# Altium PCB 电子脚铐便携式主控板V3-改版V1.PcbDoc (part 1 of 3)
Units mm, origin at the board's own origin, x right, y up, seen from the top; angles counter-clockwise.
Board outline 54 x 105 mm, 2 copper layers (Top Layer, Bottom Layer), stack 1.271 mm thick; 103 components, 64 nets, 340 pads, 43 vias.
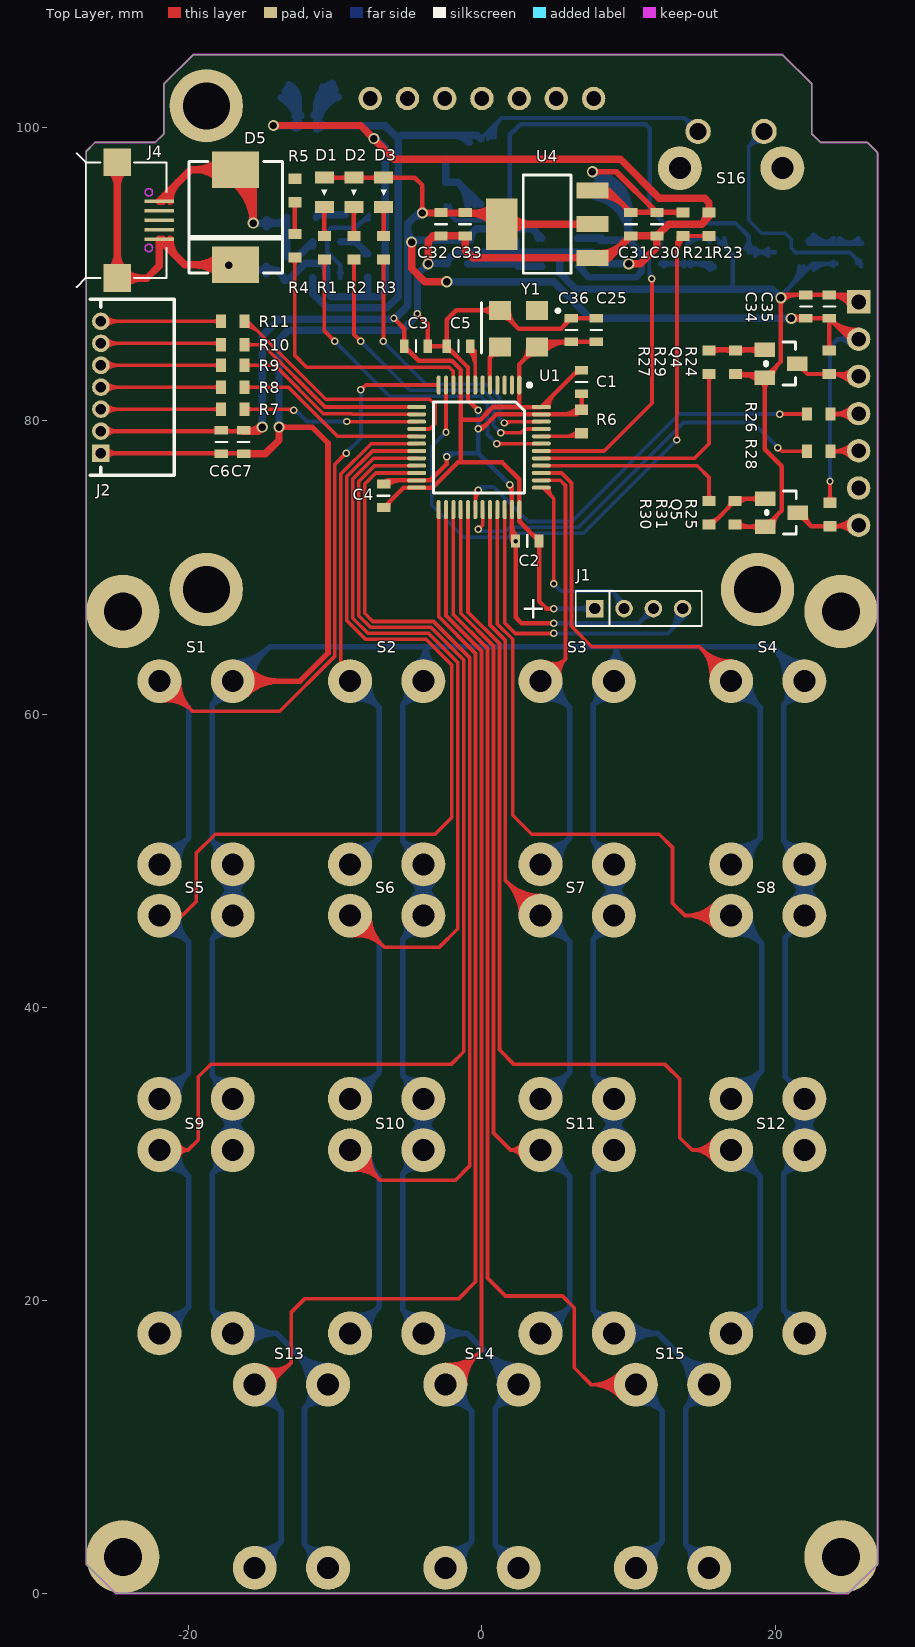
[diagram p0: Top Layer view]
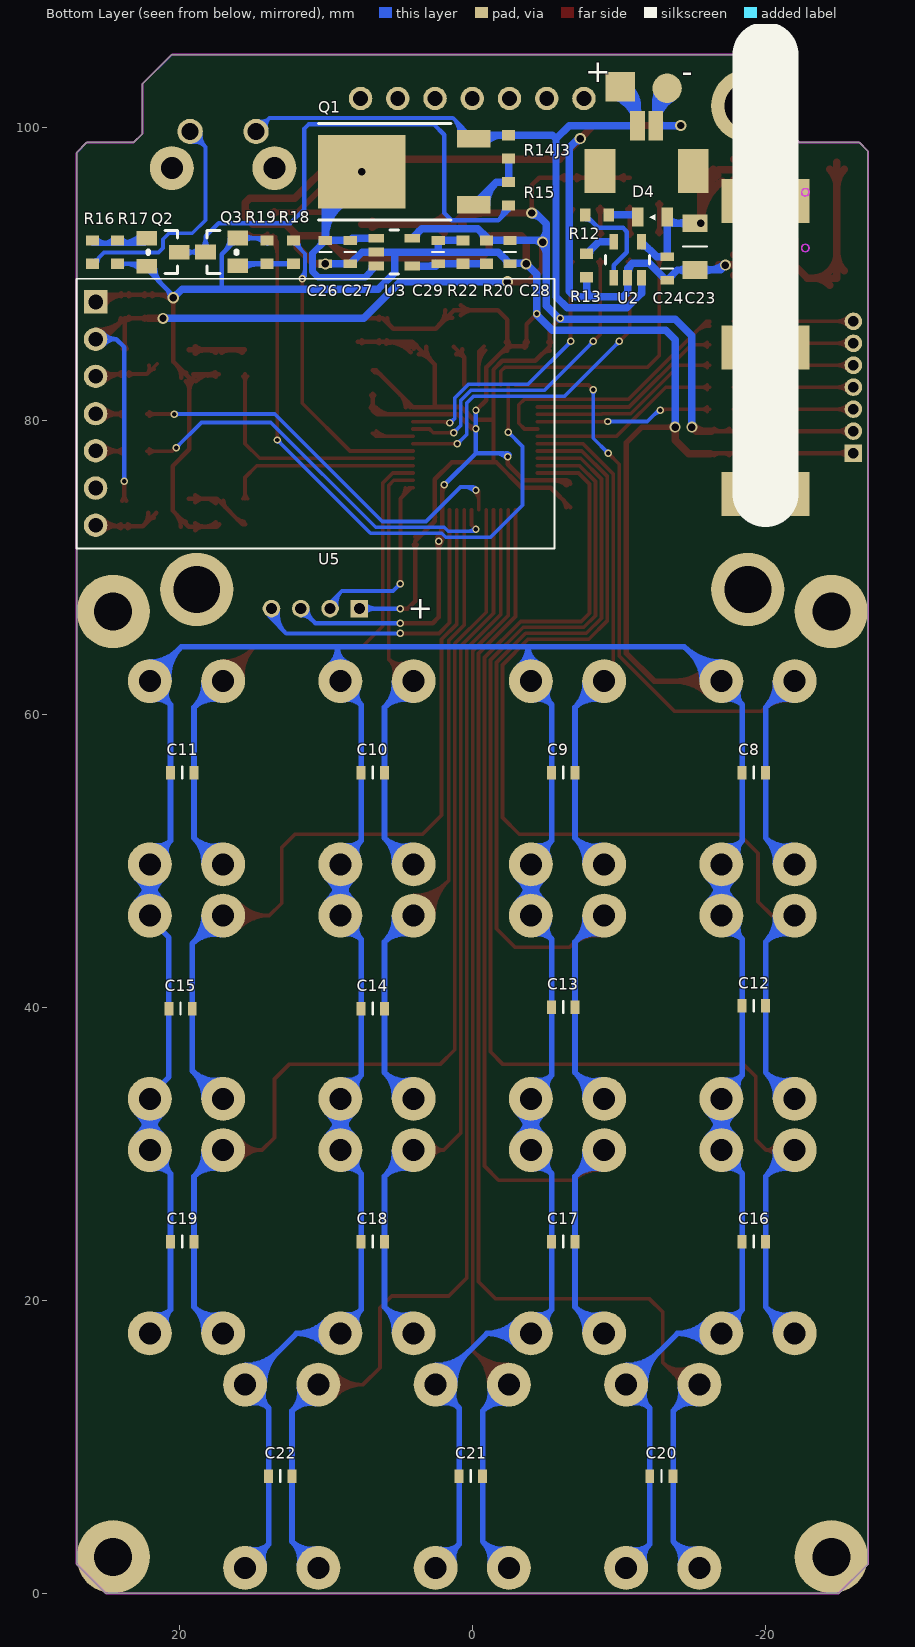
[diagram p1: Bottom Layer view, seen from below]
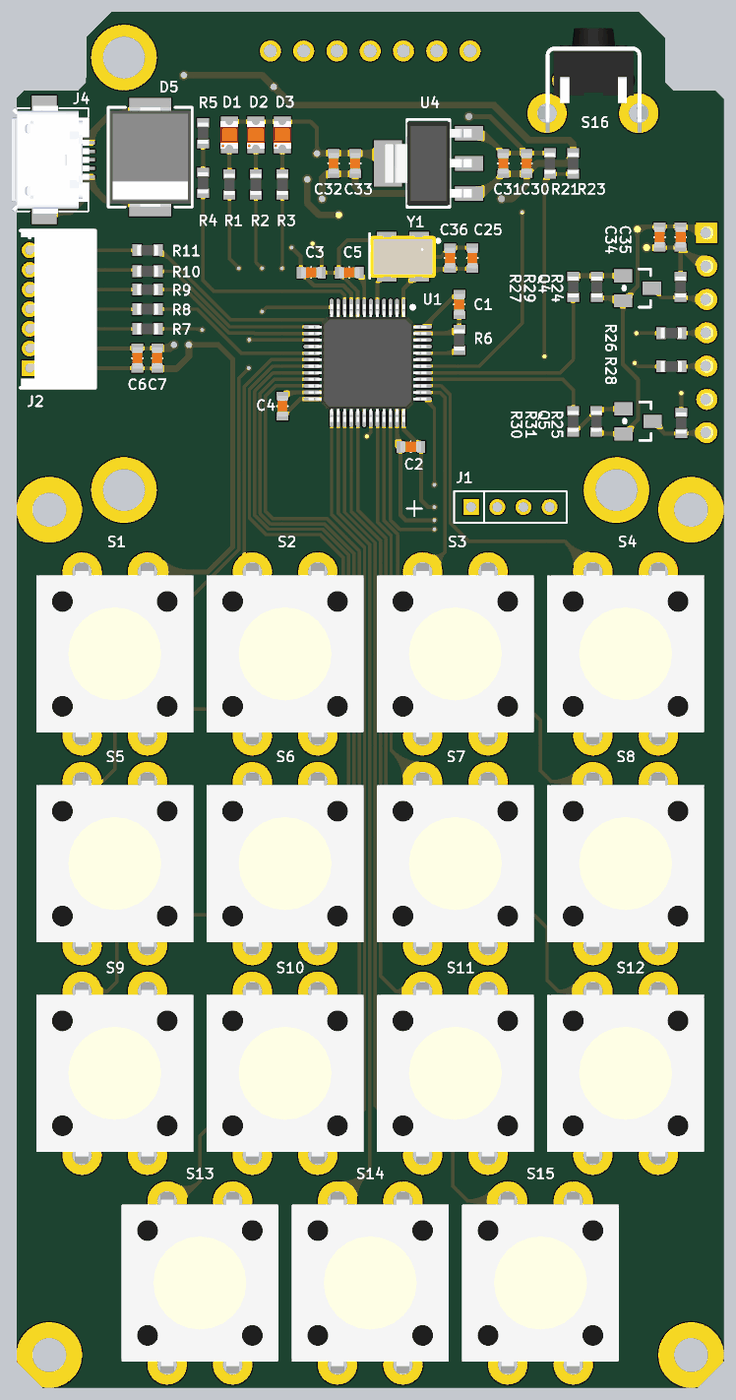
[diagram p4: 3D render of the assembled board from above, using the file's embedded part models]
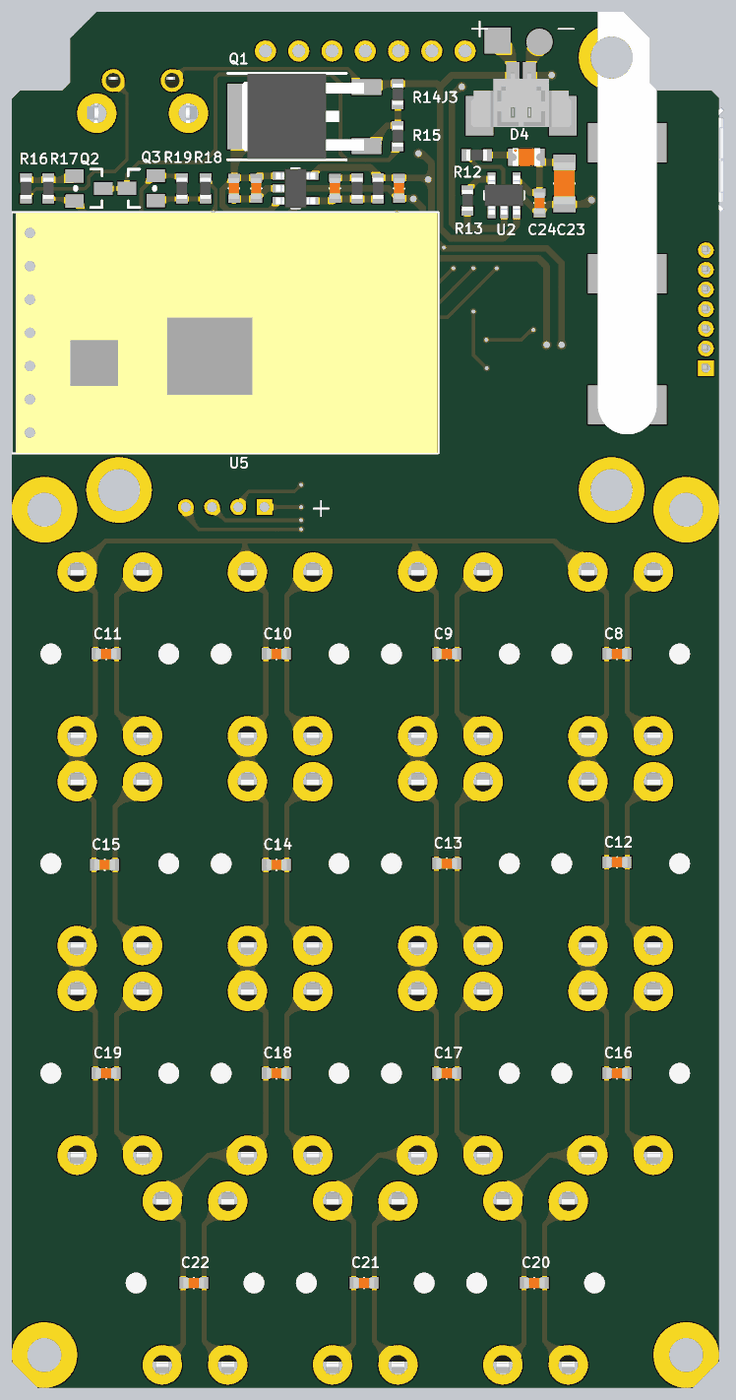
[diagram p5: 3D render of the assembled board from below, using the file's embedded part models]

## Layer stack, top to bottom
Top Solder: solder mask 0.0102, Solder Resist, Dk 3.5
Top Layer: signal copper 0.0356
Dielectric 1: dielectric 1.2, FR-4, Dk 4.8
Bottom Layer: signal copper 0.0356
Bottom Solder: solder mask 0.0102, Solder Resist, Dk 3.5

## Board outline
-27,2 -25,0 25,0 27,2 27,98.3 26.3,99 23.1,99 22.5,99.6 22.5,103 20.5,105 -19.7,105 -21.7,103 -21.7,99.6 -22.3,99 -26.4,99 -27,98.4

## Design rules (kind name [scope] priority, off if disabled: settings)
Clearance [All] p1: gap=0.152
ComponentClearance [All] p1: gap=0 collisioncheckmode=3 verticalgap=0 showdistances=FALSE
Height [All] p1: minheight=0 maxheight=50.8 prefheight=12.7
HoleSize [All] p1: absolutevalues=TRUE maxlimit=5.08 minlimit=0.025 maxpercent=80.000 minpercent=20.000
HoleToHoleClearance [All] p1: gap=0.152 allowstackedmicrovias=TRUE
MinimumSolderMaskSliver [All] p1: minsoldermaskwidth=0
PlaneConnect [All] p1: planeconnectstyle=Direct reliefexpansion=0.508 reliefentries=4 reliefconductorwidth=0.254 reliefairgap=0.254
PolygonConnect [All] p1: connectstyle=Direct reliefconductorwidth=0.254 reliefentries=4 polygonreliefangle="90 Angle" airgapwidth=0.254
RoutingVias [All] p1: holewidth=0.711 width=1.27 viastyle="Through Hole" minholewidth=0.203 minwidth=0.305 maxholewidth=5.08 maxwidth=7.62
SilkToSilkClearance [All] p1: silktosilkclearance=0
SilkToSolderMaskClearance [IsPad] p1: minsilkscreentomaskgap=0 clearancetoexposedcopper=TRUE
SolderMaskExpansion [All] p1: expansion=0.102
Width [All] p1: maxlimit=4 minlimit=0.254 preferedwidth=0.254
21 further rules are at their usual default settings.

## Classes and differential pairs
component class 电子脚铐便携式主控板-Frame: C6 C7 J2 R7 R8 R9 R10 R11
component class Designator: C23 C24 C26 C27 C28 C29 C30 C31 C32 C33 D4 D5 J3 J4 Q1 Q2 Q3 R12 R13 R14 R15 R16 R17 R19 R20 R21 R22 R23 S16 U2 U3 U4

## Components (designator, comment, footprint, x,y, rotation, side; value= is the part's Value field where it differs from the comment)
C1 "0.1uF" C0603 6.8,82.662 r270 top
C2 "0.1uF" C0603 3.1,71.8 r180 top
C3 "0.1uF" C0603 -4.5,85.1 r0 top
C4 "0.1uF" C0603 -6.7,74.9 r90 top
C5 "0.1uF" C0603 -1.6,85.1 r180 top
C6 "10uF" C0603 -17.78,78.566 r270 top
C7 "0.1uF" C0603 -16.256,78.566 r270 top
C8 "0.1uF" C0603 -19.212,56 r0 bottom
C9 "0.1uF" C0603 -6.212,56 r0 bottom
C10 "0.1uF" C0603 6.788,56 r0 bottom
C11 "0.1uF" C0603 19.788,56 r0 bottom
C12 "0.1uF" C0603 -19.212,40.1 r0 bottom
C13 "0.1uF" C0603 -6.212,40 r0 bottom
C14 "0.1uF" C0603 6.788,39.9 r0 bottom
C15 "0.1uF" C0603 19.9,39.9 r0 bottom
C16 "0.1uF" C0603 -19.212,24 r0 bottom
C17 "0.1uF" C0603 -6.212,24 r0 bottom
C18 "0.1uF" C0603 6.788,24 r0 bottom
C19 "0.1uF" C0603 19.788,24 r0 bottom
C20 "0.1uF" C0603 -12.904,8 r0 bottom
C21 "0.1uF" C0603 0.096,8 r0 bottom
C22 "0.1uF" C0603 13.096,8 r0 bottom
C23 "10uF" C1206 -15.2,91.9 r270 bottom
C24 "0.1uF" C0603 -13.3,90.4 r270 bottom
C25 "10uF" C0603 7.8,86.2 r270 top
C26 "10uF" C0603 10.024,91.519 r270 bottom
C27 "0.1uF" C0603 8.324,91.519 r90 bottom
C28 "10uF" C0603 -2.576,91.519 r270 bottom
C29 "470pF" C0603 2.324,91.519 r90 bottom
C30 "10uF" C0603 11.938,93.425 r270 top
C31 "0.1uF" C0603 10.16,93.425 r270 top
C32 "10uF" C0603 -2.794,93.425 r270 top
C33 "0.1uF" C0603 -1.143,93.425 r270 top
C34 "10uF" C0603 22.1,87.8 r90 top
C35 "0.1uF" C0603 23.7,87.8 r90 top
C36 "0.1uF" C0603 6.1,86.2 r270 top
D1 "LED" LED0805 -10.749,95.603 r270 top
D2 "LED" LED0805 -8.729,95.603 r270 top
D3 "LED" LED0805 -6.708,95.603 r270 top
D4 "LED-G" LED0805 -12.3,93.9 r0 bottom
D5 "1.5SMC6.8A" SMC -16.8,93.9 r270 top
J1 "SHD1X4-2.00" Jk1*4-2.0 10.7,67.2 r0 top
J2 "Jack 1x7" ZH-7AWD -26,82.3 r90 top
J3 "Jack 1x2" DF13-2P-1.25V -11.9,98.6 r180 bottom locked
J4 "MicroUSB" MICRO-USB -23.2,93.7 r90 top
Q1 "2SA1615" TO-252 3.724,97 r90 bottom
Q2 "S8050" SOT-23 21.1,91.507 r270 bottom
Q3 "S8050" SOT-23 17.1,91.531 r90 bottom
Q4 "S8050" SOT-23 20.4,83.9 r270 top
Q5 "S8050" SOT-23 20.447,73.74 r270 top
R1 "1K" R0603 -10.749,91.82 r270 top
R2 "1K" R0603 -8.729,91.82 r270 top
R3 "1K" R0603 -6.708,91.82 r270 top
R4 "NC" R0603 -12.762,91.947 r270 top
R5 "NC" R0603 -12.762,95.73 r270 top
R6 "100K" R0603 6.8,79.962 r90 top
R7 "0R" R0603 -17,80.8 r180 top
R8 "0R" R0603 -17,82.3 r180 top
R9 "0R" R0603 -17,83.8 r180 top
R10 "0R" R0603 -17,85.2 r180 top
R11 "0R" R0603 -17,86.8 r180 top
R12 "1K" R0603 -8.509,94.06 r180 bottom
R13 "1.65K" R0603 -7.8,90.6 r90 bottom
R14 "200K" R0603 -2.476,98.7 r270 bottom
R15 "0R" R0603 -2.476,95.5 r270 bottom
R16 "20K" R0603 25.9,91.519 r90 bottom
R17 "10K" R0603 24.2,91.519 r270 bottom
R18 "20K" R0603 12.2,91.519 r270 bottom
R19 "10K" R0603 14,91.519 r90 bottom
R20 "100K" R0603 -0.976,91.519 r270 bottom
R21 "200K" R0603 13.716,93.425 r270 top
R22 "160K" R0603 0.624,91.519 r90 bottom
R23 "100K" R0603 15.494,93.425 r90 top
R24 "200K" R0603 23.7,84 r90 top
R25 "200K" R0603 23.749,73.613 r90 top
R26 "200K" R0603 22.987,80.471 r180 top
R27 "200K" R0603 15.5,84 r270 top
R28 "200K" R0603 22.987,77.931 r180 top
R29 "10K" R0603 17.3,84 r90 top
R30 "200K" R0603 15.494,73.74 r90 top
R31 "10K" R0603 17.272,73.74 r90 top
S1 "Switch" B3F-4055 -19.5,56 r90 top
S2 "Switch" B3F-4055 -6.5,56 r90 top
S3 "Switch" B3F-4055 6.5,56 r90 top
S4 "Switch" B3F-4055 19.5,56 r90 top
S5 "Switch" B3F-4055 -19.5,40 r90 top
S6 "Switch" B3F-4055 -6.5,40 r90 top
S7 "Switch" B3F-4055 6.5,40 r90 top
S8 "Switch" B3F-4055 19.5,40 r90 top
S9 "Switch" B3F-4055 -19.5,24 r90 top
S10 "Switch" B3F-4055 -6.5,24 r90 top
S11 "Switch" B3F-4055 6.5,24 r90 top
S12 "Switch" B3F-4055 19.5,24 r90 top
S13 "Switch" B3F-4055 -13,8 r90 top
S14 "Switch" B3F-4055 0,8 r90 top
S15 "Switch" B3F-4055 13,8 r90 top
S16 "Switch" SWITCH-H 17,98.5 r180 top
U1 "STM32F103CB" LQFP48 -0.2,78.2 r270 top
U2 "SE9016" SOT-23-5 -10.6,91 r90 bottom
U3 "MIC5219YM5" SOT-23-5 5.324,91.519 r180 bottom
U4 "LM1117IMPX-3.3" SOT-223 4.445,93.425 r90 top
U5 "APC340" APC340 25.7,80.5 r180 bottom locked
Y1 "8MHz" XTAL5032 2.5,86.3 r180 top

## Footprints (in the part's own frame and the unit in brackets; to place one, negate y for a bottom-side part, rotate by r counter-clockwise, add the part's x,y. Pads: shape width x height; smd on the part's side, far side on the other; paste and mask are expansions set on the pad)
APC340 [mm]
  rect 1.6x1.6 hole 1: 1(0,7.62)
  round 1.6 hole 1: 2(0,5.08) 3(0,2.54) 4(0,0) 5(0,-2.54) 6(0,-5.08) 7(0,-7.62)
  silkscreen extent -1.3,-9.2 31.3,9.2, body extent -1,-9.15 31.2,9.15, height 2
B3F-4055 [mm]
  round 3 hole 1.5: 1(-6.25,-2.5) 1(6.25,-2.5) 2(-6.25,2.5) 2(6.25,2.5)
  body extent -6.9,-6 6.9,6, height 7.3
C0603 [mm]
  rect 0.6x0.9 smd: 1(-0.8,0) 2(0.8,0)
  silkscreen extent 0,-0.4 0,0.4, body extent -0.8,-0.4 0.8,0.4, height 0.5
C1206 [mm]
  rect 1.2x1.7 smd: 1(-1.6,0) 2(1.6,0)
  silkscreen extent 0,-0.8 0,0.8, body extent -1.6,-0.8 1.6,0.8, height 1.25
DF13-2P-1.25V [mm]
  rect 1x2 smd: 1(-0.625,1.55) 2(0.625,1.55)
  rect 2.1x3 smd: 3(-3.175,-1.55) 4(3.175,-1.55)
  body extent -3.83,-2.41 3.82,1.79, height 4.8
Jk1*4-2.0 [mm] "4P，直插，2.0mm间距，排母"
  rect 1.2x1.2 hole 0.762: 1(-3,0)
  round 1.2 hole 0.762: 2(-1,0) 3(1,0) 4(3,0)
  silkscreen extent -4.3,-1.2 4.3,1.2, body extent -4.25,-1.22 4.25,1.18, height 4.3
LED0805 [mm]
  rect 0.8x1.3 smd: 1(-1,0) 2(1,0)
  silkscreen extent -0.18,-0.2 0.22,0.2, body extent -1.05,-0.68 1.05,0.67, height 0.8
LQFP48 [mm]
  oval 1.3x0.28 smd: 1(-4.25,2.75) 2(-4.25,2.25) 3(-4.25,1.75) 4(-4.25,1.25) 5(-4.25,0.75) 6(-4.25,0.25) 7(-4.25,-0.25) 8(-4.25,-0.75) 9(-4.25,-1.25) 10(-4.25,-1.75) 11(-4.25,-2.25) 12(-4.25,-2.75) 25(4.25,-2.75) 26(4.25,-2.25) 27(4.25,-1.75) 28(4.25,-1.25) 29(4.25,-0.75) 30(4.25,-0.25) 31(4.25,0.25) 32(4.25,0.75) 33(4.25,1.25) 34(4.25,1.75) 35(4.25,2.25) 36(4.25,2.75)
  oval 0.28x1.3 smd: 13(-2.75,-4.25) 14(-2.25,-4.25) 15(-1.75,-4.25) 16(-1.25,-4.25) 17(-0.75,-4.25) 18(-0.25,-4.25) 19(0.25,-4.25) 20(0.75,-4.25) 21(1.25,-4.25) 22(1.75,-4.25) 23(2.25,-4.25) 24(2.75,-4.25) 37(2.75,4.25) 38(2.25,4.25) 39(1.75,4.25) 40(1.25,4.25) 41(0.75,4.25) 42(0.25,4.25) 43(-0.25,4.25) 44(-0.75,4.25) 45(-1.25,4.25) 46(-1.75,4.25) 47(-2.25,4.25) 48(-2.75,4.25)
  silkscreen extent -4.37,-3.1 3.1,3.58, body extent -4.49,-4.5 4.51,4.5, height 1.8
MICRO-USB [mm]
  rect 0.25x2 smd: 1(1.3,-1.179) 2(0.65,-1.179) 3(0,-1.179) 4(-0.65,-1.179) 5(-1.3,-1.179)
  rect 1.9x1.9 smd: 5(-3.95,1.679) 5(3.95,1.679)
  Keep-Out Layer circle w0.102: c1.9,-0.471 r0.254
  Keep-Out Layer circle w0.102: c-1.9,-0.471 r0.254
  silkscreen extent -4.57,-1.68 4.57,4.46, body extent -4.1,-1.75 4.1,4.18, height 2.77
R0603 [mm]
  rect 0.7x0.9 smd: 1(-0.8,0) 2(0.8,0)
  body extent -0.8,-0.4 0.8,0.4, height 0.37
SMC [mm]
  rect 2.5x3.2 smd: 1(-3.25,0) 2(3.25,0)
  silkscreen extent -3.8,-3.2 3.8,3.2, body extent -3.8,-3.1 3.8,3.12, height 2.8
SOT-23 [mm]
  rect 1x1.4 smd: 1(-0.95,-1.1) 2(0.95,-1.1) 3(0,1.1)
  silkscreen extent -1.47,-1.02 1.45,1, body extent -1.41,-1 1.38,1.42, height 1.09
SOT-23-5 [mm]
  rect 1.05x0.6 smd: 1(-1.225,0.95) 2(-1.225,0) 3(-1.225,-0.95) 4(1.225,-0.95) 5(1.225,0.95)
  silkscreen extent -0.3,-1.5 0.3,1.5, body extent -1.5,-1.5 1.5,1.5, height 1.2
SOT-223 [mm]
  rect 1.1x2.15 smd: 1(-2.3,-3.1) 2(0,-3.1) 3(2.3,-3.1)
  rect 3.5x2.15 smd: 4(0,3.1)
  silkscreen extent -3.35,-1.63 3.35,1.63, body extent -3.15,-3.3 3.15,3.3, height 1.8
SWITCH-H [mm]
  round 3 hole 1.5: 0(-3.5,1.25) 0(3.5,1.25)
  round 1.727 hole 1.143: 1(-2.25,-1.25) 2(2.25,-1.25)
  body extent -4.23,-5.26 4.13,2.71, height 7.37
TO-252 [mm]
  rect 1.2x2.28 smd: 1(-2.25,-3.816) 3(2.25,-3.816)
  rect 5x6 smd: 2(0,3.816)
  silkscreen extent -3.3,-2.27 3.3,6.78, body extent -3.25,-3.62 3.25,5.68, height 2.3
XTAL5032 [mm]
  rect 1.5x1.3 smd: 1(-1.25,-1.25) 2(1.25,-1.25) 3(1.25,1.25) 4(-1.25,1.25)
  silkscreen extent -2.81,-1.78 2.54,1.65, body extent -2.5,-1.6 2.5,1.6, height 1.2
ZH-7AWD [mm] "1.5mm，7P，卧插"
  rect 1.2x1.2 hole 0.7: 1(-4.5,0)
  round 1.2 hole 0.7: 2(-3,0) 3(-1.5,0) 4(0,0) 5(1.5,0) 6(3,0) 7(4.5,0)
  silkscreen extent -6,-5 6,0.7, body extent -5.9,-5.05 6.1,0.65, height 3.95

## Part data
C1 C2 C3 C4 C5 C8 C9 C10 C11 C12 C13 C14 C15 C16 C17 C18 C19 C20 C21 C22 C25 C27 C36: library part "Cap Semi"
C6 C7 C26 C28 C29 C30 C31 C32 C33 C34 C35: library part CAP, "CAP"
C23 C24: library part Cap, "Capacitor"
D4: library part LED
D5: library part Diode-TVS
J1: library part HEADER1X4
J2 J3: "插座"
Q1: library part MJD122
Q2 Q3 Q4 Q5: "NPN triode, 0.5A Max"
R1 R2 R3 R4 R5 R12 R13: library part Res, "Resistor"
R6 R7 R8 R9 R10 R11 R14 R16 R17 R18 R19 R20 R21 R22 R23: library part Res
R15 R24 R25 R26 R27 R28 R29 R30 R31: library part RES, "Resistor"
S1 S2 S3 S4 S5 S6 S7 S8 S9 S10 S11 S12 S13 S14 S15 S16: library part Sw
U1: library part STM32F103Cx
U3: library part MIC5205
U4: library part AMS1117, "800mA Low-Dropout Linear Regulator"
Y1: library part XTAL, "SM crystal oscilator"

## Free pads (board coordinates)
  round 5 hole 2.6: ""(-24.5,2.5) ""(-24.5,67) ""(24.5,2.5) ""(24.5,67)
  rect 2x3 smd far side: ""(-22,75) ""(-22,85) ""(-22,95) ""(-18,75) ""(-18,85) ""(-18,95)
  round 5 hole 3.2: ""(-18.8,68.5) ""(-18.8,101.5) ""(18.8,68.5)
  round 2 smd far side: ""(-13.3,102.7)
  rect 2x2 smd far side: ""(-10.1,102.8)
  round 1.6 hole 1: ""(-7.62,102) ""(-5.08,102) ""(-2.54,102) ""(0,102) ""(2.54,102) ""(5.08,102) ""(7.62,102)

## Via types
v1: diameter 0.508, hole 0.305, Top Layer to Bottom Layer, tented both sides, 29 vias
v2: diameter 0.762, hole 0.508, Top Layer to Bottom Layer, tented both sides, 14 vias

## Nets (pads, with @x,y where several pads share a name; then routed paths per layer and width w, separated by ;. In a path a pad name is that pad's centre, name@x,y a point inside that pad or via, vN(x,y) a via of type N, cw(c..) or ccw(c..) an arc to the next point about the centre after c; other vN are vias at no path point)
+3.3V: C1.1 C2.1 C3.1 C4.1 C6.1 C7.1 C25.2 C28.1 C32.1 C33.1 C34.1 C35.1 C36.2 D1.1 D2.1 D3.1 J1.1 J2.2 R20.1 R24.2 R25.2 U1.1 U1.9 U1.24 U1.36 U1.48 U3.5 U4.2 U4.4 U5.2 Y1.4 | length 221
  Top Layer w0.305: J2.2@-26,79.3 C7.1@-16.3,79.3 ; J2.2@-25.683,78.984 cw(c-24.919,78.219) -24.919,79.3 cw(c-24.919,80.381) J2.2@-25.683,79.617 ; -18.446,79.3 ccw(c-18.446,79.882) C6.1@-18.034,79.47 ; C6.1@-17.526,79.47 ccw(c-17.114,79.882) -17.114,79.3 ; -16.922,79.3 ccw(c-16.922,79.882) C7.1@-16.51,79.47 ; D1.1@-10.749,96.603 D2.1@-8.729,96.603 D3.1@-6.708,96.603 -4.575,96.603 -4.064,96.092 v2(-4.064,94.187) ; D1.1@-10.324,96.428 cw(c-9.901,96.005) -9.901,96.603 cw(c-9.901,97.201) D1.1@-10.324,96.778 ; D2.1@-9.154,96.428 ccw(c-9.576,96.005) -9.576,96.603 ccw(c-9.576,97.201) D2.1@-9.154,96.778 ; D2.1@-8.304,96.428 cw(c-7.881,96.005) -7.881,96.603 cw(c-7.881,97.201) D2.1@-8.304,96.778 ; D3.1@-7.133,96.428 ccw(c-7.556,96.005) -7.556,96.603 ccw(c-7.556,97.201) D3.1@-7.133,96.778 ; C4.1@-6.7,74.1 -5.35,75.45 U1.24@-4.45,75.45 -3.37,75.45 -1.651,77.169 1.397,77.169 2.55,76.016 U1.36@2.55,73.95 2.55,73.15 C2.1@3.9,71.8 3.9,67.7 4.4,67.2 v1(4.9,67.2) ; C4.1@-6.402,74.1 cw(c-5.684,74.1) -6.192,74.608 ; D3.1@-6.283,96.428 cw(c-5.861,96.005) -5.861,96.603 cw(c-5.861,97.201) D3.1@-6.283,96.778 ; v1(-6,87) -5.3,86.3 C3.1@-5.3,85.1 -4.3,84.1 -2.047,84.1 -1.45,83.503 U1.9@-1.45,82.45 -1.45,80.09 ; C3.1@-5.404,85.354 ccw(c-5.656,85.606) -5.3,85.606 ccw(c-4.944,85.606) C3.1@-5.196,85.354 ; C3.1@-5.3,84.802 cw(c-5.3,84.084) -4.792,84.592 ; v2@-4.226,94.349 ccw(c-4.616,94.739) -4.064,94.739 ccw(c-3.512,94.739) v2@-3.902,94.349 ; -1.45,77.169 -1.45,80.09 ; U1.36@2.538,73.44 ccw(c3.208,73.44) 2.734,72.966 ; 2.73,84.03 ccw(c1.71,85.05) Y1.4@3.152,85.05 ; 2.971,84.271 cw(c3.65,83.593) Y1.4@3.65,84.552 ; 3.392,72.308 ccw(c3.9,72.816) C2.1@3.9,72.098 ; Y1.4@3.771,85.129 cw(c4.425,84.475) Y1.4@4.425,85.4 ; C2.1@3.796,71.546 cw(c3.544,71.294) 3.9,71.294 cw(c4.256,71.294) C2.1@4.004,71.546 ; Y1.4@3.986,84.914 cw(c5.16,83.74) 5.16,85.4 ; Y1.4@4.202,84.698 cw(c5.896,83.004) C36.2@5.896,85.4 ; U1.48@4.243,80.95 cw(c4.708,80.95) 4.379,81.279 ; U1.48@4.548,80.95 cw(c5.749,80.95) 4.899,81.799 ; 5.571,85.319 cw(c5.668,84.93) C36.2@5.874,85.273 ; 5.632,85.334 ccw(c5.556,85.637) C36.2@5.823,85.476 ; C36.2@5.846,85.296 ccw(c5.594,85.044) 5.594,85.4 ccw(c5.594,85.756) C36.2@5.846,85.504 ; 6.248,83.148 cw(c6.65,82.746) C1.1@6.65,83.314 ; C36.2@6.354,85.296 cw(c6.606,85.044) 6.606,85.4 cw(c6.606,85.756) C36.2@6.354,85.504 ; C1.1@6.8,83.462 6.562,83.462 U1.48@4.05,80.95 0.761,80.95 0.305,80.494 ; C25.2@7.546,85.296 ccw(c7.294,85.044) 7.294,85.4 ccw(c7.294,85.756) C25.2@7.546,85.504 ; C25.2@7.8,85.4 C36.2@6.1,85.4 4.1,85.4 Y1.4@3.75,85.05 2.55,83.85 U1.1@2.55,82.45 2.55,80.979 0.762,80.979 0.305,80.522 0.305,80.494 ; C34.1@22.1,87 C35.1@23.7,87 ; C34.1@22.354,86.896 cw(c22.606,86.644) 22.606,87 cw(c22.606,87.356) C34.1@22.354,87.104 ; C35.1@23.446,86.896 ccw(c23.194,86.644) 23.194,87 ccw(c23.194,87.356) C35.1@23.446,87.104 ; R24.2@23.56,84.94 ccw(c23.223,85.277) 23.7,85.277 ccw(c24.177,85.277) R24.2@23.84,84.94 ; C35.1@23.596,86.896 cw(c23.344,86.644) 23.7,86.644 cw(c24.056,86.644) C35.1@23.804,86.896 ; R25.2@23.609,74.553 ccw(c23.272,74.89) 23.749,74.89 ccw(c24.226,74.89) R25.2@23.889,74.553 ; R24.2@23.7,84.8 C35.1@23.7,87 ; R25.2@23.749,74.749 v1(23.749,75.899) ; C35.1@23.998,87 ccw(c24.716,87) 24.208,86.492 ; 24.193,86.507 ccw(c25.608,87.922) U5.2@25.687,85.923 ; 24.686,86.014 ccw(c25.645,86.974) U5.2@25.699,85.618 ; U5.2@25.675,86.227 cw(c25.571,88.871) C35.1@23.7,87 ; U5.2@25.7,85.58 25.12,85.58 C35.1@23.7,87 ; -1.45,80.09 -0.099,80.09 0.305,80.494
  Top Layer w0.381: U4.4@0.545,94.225 U4.4@1.345,93.425
  Top Layer w0.508: C7.1@-16.3,79.3 -15.268,79.3 v2(-14.986,79.582) ; C7.1@-15.973,79.3 ccw(c-15.973,80.569) v2@-15.076,79.672 ; v2(-4.8,92.2) -4.8,90.4 -3.9,89.5 v2(-2.4,89.5) ; v2(-4.064,94.187) 0.507,94.187 U4.4@0.545,94.225 ; C33.1@-0.847,94.187 cw(c-0.847,91.908) U4.4@0.764,93.519 ; -0.427,94.187 ccw(c-0.427,95.872) U4.4@0.764,94.681 ; U4.4@1.345,93.425 U4.2@7.545,93.425 ; U4.4@1.926,92.844 cw(c3.327,91.443) 3.327,93.425 cw(c3.327,95.407) U4.4@1.926,94.006 ; U4.2@6.811,93.216 ccw(c6.305,92.71) 6.305,93.425 ccw(c6.305,94.14) U4.2@6.811,93.634 ; v2(21.1,87) C34.1@22.1,87
  Bottom Layer w0.305: v1(4.9,67.2) J1.1@7.7,67.2 ; J1.1@7.383,66.884 ccw(c6.619,66.119) 6.619,67.2 ccw(c6.619,68.281) J1.1@7.383,67.517 ; v1(23.749,75.899) 23.749,85.043 24.286,85.58 ; U5.2@25.21,85.157 ccw(c24.286,84.36) 24.286,85.58 ; U5.2@25.21,86.003 cw(c24.286,86.8) 24.286,85.58 ; U5.2@25.7,85.58 24.286,85.58
  Bottom Layer w0.508: v2(-14.986,79.582) -14.986,85.805 -13.843,86.948 -5.969,86.948 -5.055,87.862 -5.055,91.799 ; -5.055,91.279 cw(c-3.879,91.279) -4.71,92.11 cw(c-4.206,91.606) -4.206,92.319 ; -5.055,93.121 ccw(c-3.879,93.121) v2@-4.71,92.29 ; v2@-4.926,92.183 cw(c-5.376,92.121) -5.055,91.799 ; -4.714,93.791 cw(c-4.064,93.14) v2@-4.064,94.06 ; v2(-4.064,94.187) -4.318,94.187 -5.055,93.45 -5.055,91.799 ; v2(-2.4,89.5) 4.9,89.5 7.4,87 v2(21.1,87) ; R20.1@-0.78,92.319 cw(c0.191,92.319) -0.496,93.006 ; 3.636,92.932 cw(c3.174,92.469) U3.5@3.828,92.469 ; U3.5@4.099,92.469 3.448,93.12 -0.381,93.12 -0.976,92.525 R20.1@-0.976,92.319 C28.1@-2.576,92.319 -4.535,92.319 -5.055,91.799 ; -5.055,91.725 cw(c-4.696,91.725) -4.773,92.076 ccw(c-4.696,91.725) -5.055,91.725
ADPOW: R21.2 R23.1 U1.11 | length 51.1
  Top Layer w0.254: v1@-2.54,79.328 ccw(c-2.757,79.545) -2.45,79.545 ccw(c-2.143,79.545) v1@-2.36,79.328 ; v1(-2.45,79.238) U1.11@-2.45,82.45 ; v1@13.21,78.79 ccw(c12.993,79.007) 13.3,79.007 ccw(c13.607,79.007) v1@13.39,78.79 ; v1(13.3,78.7) 13.3,80.49 ; 13.31,80.49 13.31,92.219 ; 13.31,91.347 cw(c14.894,91.347) R21.2@13.774,92.467 ; 13.31,91.96 cw(c14.281,91.96) R21.2@13.594,92.647 ; R21.2@13.401,92.566 cw(c13.058,92.471) 13.31,92.219 ; R21.2@13.406,92.315 cw(c13.616,92.105) R21.2@13.616,92.402 ; R21.2@13.974,92.467 cw(c14.354,92.087) 14.354,92.625 cw(c14.354,93.163) R21.2@13.974,92.783 ; R23.1@15.236,92.467 ccw(c14.856,92.087) 14.856,92.625 ccw(c14.856,93.163) R23.1@15.236,92.783 ; R23.1@15.494,92.625 R21.2@13.716,92.625 13.31,92.219
  Bottom Layer w0.254: v1@-2.577,79.238 cw(c-2.884,79.238) -2.667,79.021 cw(c-2.45,78.804) v1@-2.45,79.111 ; v1(-2.45,79.238) -3.429,78.259 -3.429,74.248 -1.245,72.064 1.809,72.064 2.079,72.333 6.933,72.333 v1(13.3,78.7) ; v1@13.173,78.7 cw(c12.866,78.7) 13.083,78.483 cw(c13.3,78.266) v1@13.3,78.573
BAT: J3.1 pad.@-10.1,102.8 Q1.3 R14.1 S16.2 U2.3 | length 68
  Bottom Layer w0.254: Q1.3@-0.092,99.25 1.322,100.664 ; Q1.3@0.414,99.243 cw(c1.229,99.398) 0.642,99.984 ; Q1.3@0.663,99.291 cw(c1.8,99.506) 0.982,100.324 ; Q1.3@0.913,99.338 cw(c2.372,99.614) 1.322,100.664 ; S16.2@14.036,99.933 ccw(c13.295,100.122) 13.836,100.664 ccw(c14.377,101.205) S16.2@14.567,100.464 ; S16.2@14.75,99.75 13.836,100.664 1.322,100.664
  Bottom Layer w0.508: U2.3@-11.55,89.775 -11.55,88.719 -10.541,87.71 -6.477,87.71 -5.715,88.472 -5.715,99.261 ; J3.1@-11.449,100.824 ccw(c-11.869,101.244) -11.275,101.244 ccw(c-10.681,101.244) J3.1@-11.101,100.824 ; J3.1@-11.398,100.863 ccw(c-11.687,101.364) -11.129,101.214 ; J3.1@-11.275,99.901 cw(c-8.873,99.901) pad.@-9.809,102.113 ; J3.1@-11.275,100.668 cw(c-9.198,100.668) pad.@-10.007,102.581 ; -11.275,101.434 cw(c-9.522,101.434) pad.@-10.205,103.049 ; -11.123,101.236 ccw(c-10.534,101.078) J3.1@-11.062,100.773 ; J3.1@-11.101,99.976 cw(c-10.681,99.556) -10.681,100.15 cw(c-10.681,100.744) J3.1@-11.101,100.324 ; pad.@-10.845,102.756 cw(c-12.319,102.67) -11.275,101.625 ; pad.@-10.144,102.055 ccw(c-10.23,100.581) -11.275,101.625 ; pad.@-10.1,102.8 -11.275,101.625 ; R14.1@-2.071,99.5 cw(c-2.071,97.811) Q1.3@-0.877,99.005 ; Q1.3@-0.092,99.25 -0.342,99.5 R14.1@-2.476,99.5 -5.476,99.5 -5.715,99.261 ; -11.275,101.625 J3.1@-11.275,100.15 -6.604,100.15 -5.715,99.261
BATOUT: C26.1 C27.2 C30.1 C31.1 Q1.2 R21.1 U3.1 U3.3 U4.3 | length 50.9
  Top Layer w0.381: v2(7.54,97) 9.163,97 C30.1@11.938,94.225 ; U4.3@7.545,95.725 8.66,95.725 ; v2@7.675,96.865 cw(c8,96.54) 8,97 cw(c8,97.46) v2@7.675,97.135 ; U4.3@8.07,95.366 cw(c8.07,93.073) 9.691,94.694 ; U4.3@8.07,95.747 cw(c8.07,94.374) 9.04,95.345 ; U4.3@8.389,95.56 cw(c8.66,95.421) 8.66,95.725 ; U4.3@8.389,95.89 ccw(c8.66,96.029) 8.66,95.725 ; 9.717,94.668 cw(c9.274,94.225) C31.1@9.901,94.225 ; 11.495,94.668 cw(c11.052,94.225) C30.1@11.679,94.225 ; R21.1@13.503,94.112 ccw(c13.231,93.84) 13.231,94.225 ccw(c13.231,94.61) R21.1@13.503,94.338 ; R21.1@13.716,94.225 C30.1@11.938,94.225 ; 8.66,95.725 C31.1@10.16,94.225 C30.1@11.938,94.225
  Bottom Layer w0.457: U3.3@6.549,90.569 7.318,89.8 10.5,89.8 10.9,90.2 10.9,91.443 C26.1@10.024,92.319 ; U3.3@6.845,90.569 ccw(c7.561,90.569) 7.055,90.063 ; C26.1@10.245,92.319 ccw(c10.78,92.319) 10.402,91.941
  Bottom Layer w0.508: U3.1@6.549,92.469 8.174,92.469 C27.2@8.324,92.319 C26.1@10.024,92.319 10.024,94.516 v2(7.54,97) ; 7.701,92.469 cw(c7.701,91.846) C27.2@8.141,92.286 ; Q1.2@7.724,95.291 cw(c7.213,92.527) C26.1@10.024,92.527 ; Q1.2@7.816,95.791 cw(c7.326,93.137) 10.024,93.137 ; Q1.2@7.909,96.29 cw(c7.439,93.748) 10.024,93.748 ; Q1.2@8.001,96.79 cw(c7.551,94.358) 10.024,94.358
BOOT0: R6.1 U1.44 | length 4.3
  Top Layer w0.254: U1.44@4.05,78.95 6.588,78.95 R6.1@6.8,79.162 ; 5.65,78.95 ccw(c5.65,80.212) R6.1@6.542,79.32 ; 6.263,78.95 ccw(c6.263,79.599) R6.1@6.722,79.14